# Altium PCB TEMPLATE_PCB_4L.PcbDoc
Units mm, origin at the board's own origin, x right, y up, seen from the top; angles counter-clockwise.
Board outline 50 x 50 mm, 4 copper layers (Top, GND, PWR, Bottom), stack 1.591 mm thick; 51 components, 38 nets, 188 pads, 0 vias.
Unrouted connection lines stored in the file: 119.
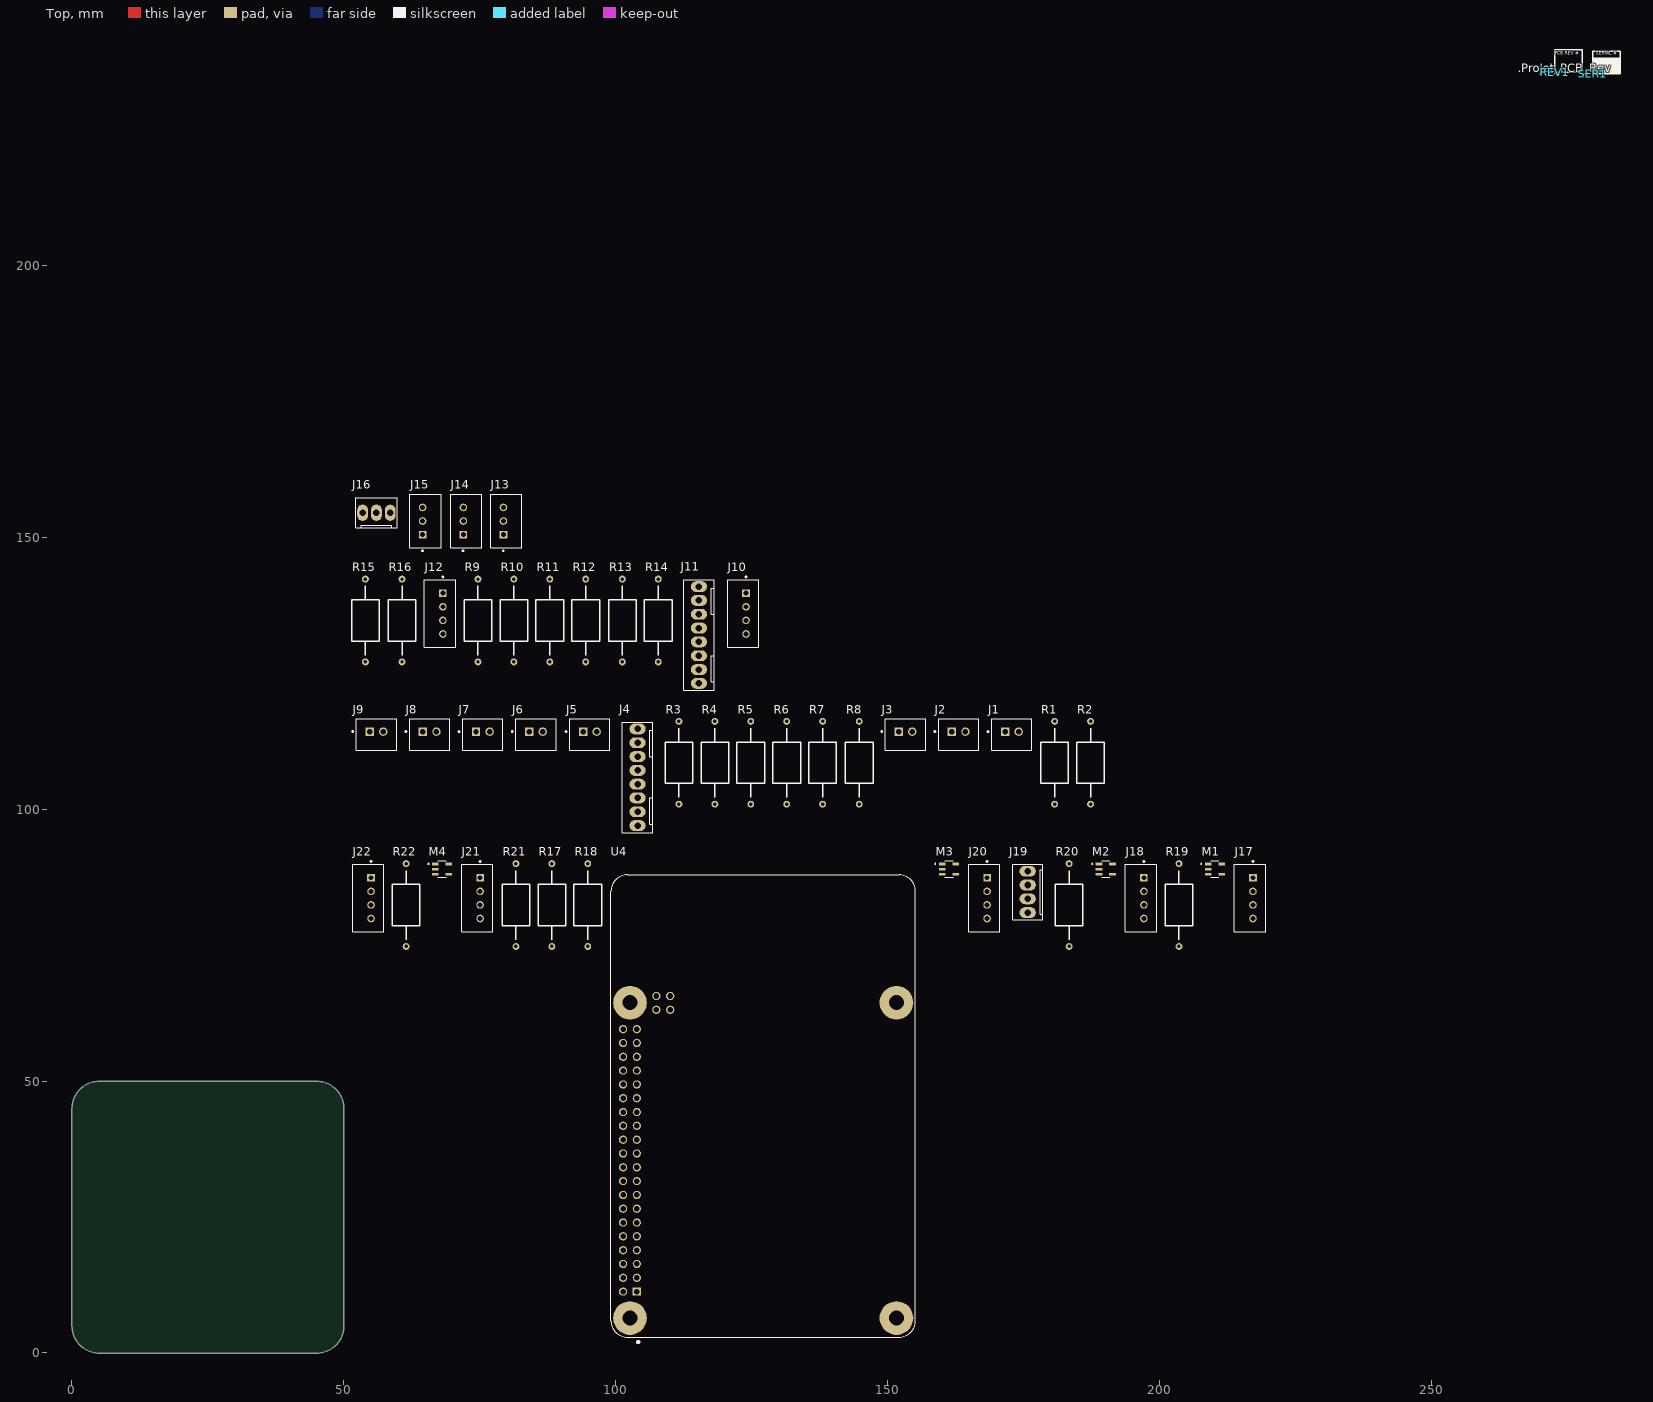
[diagram p0: Top view]
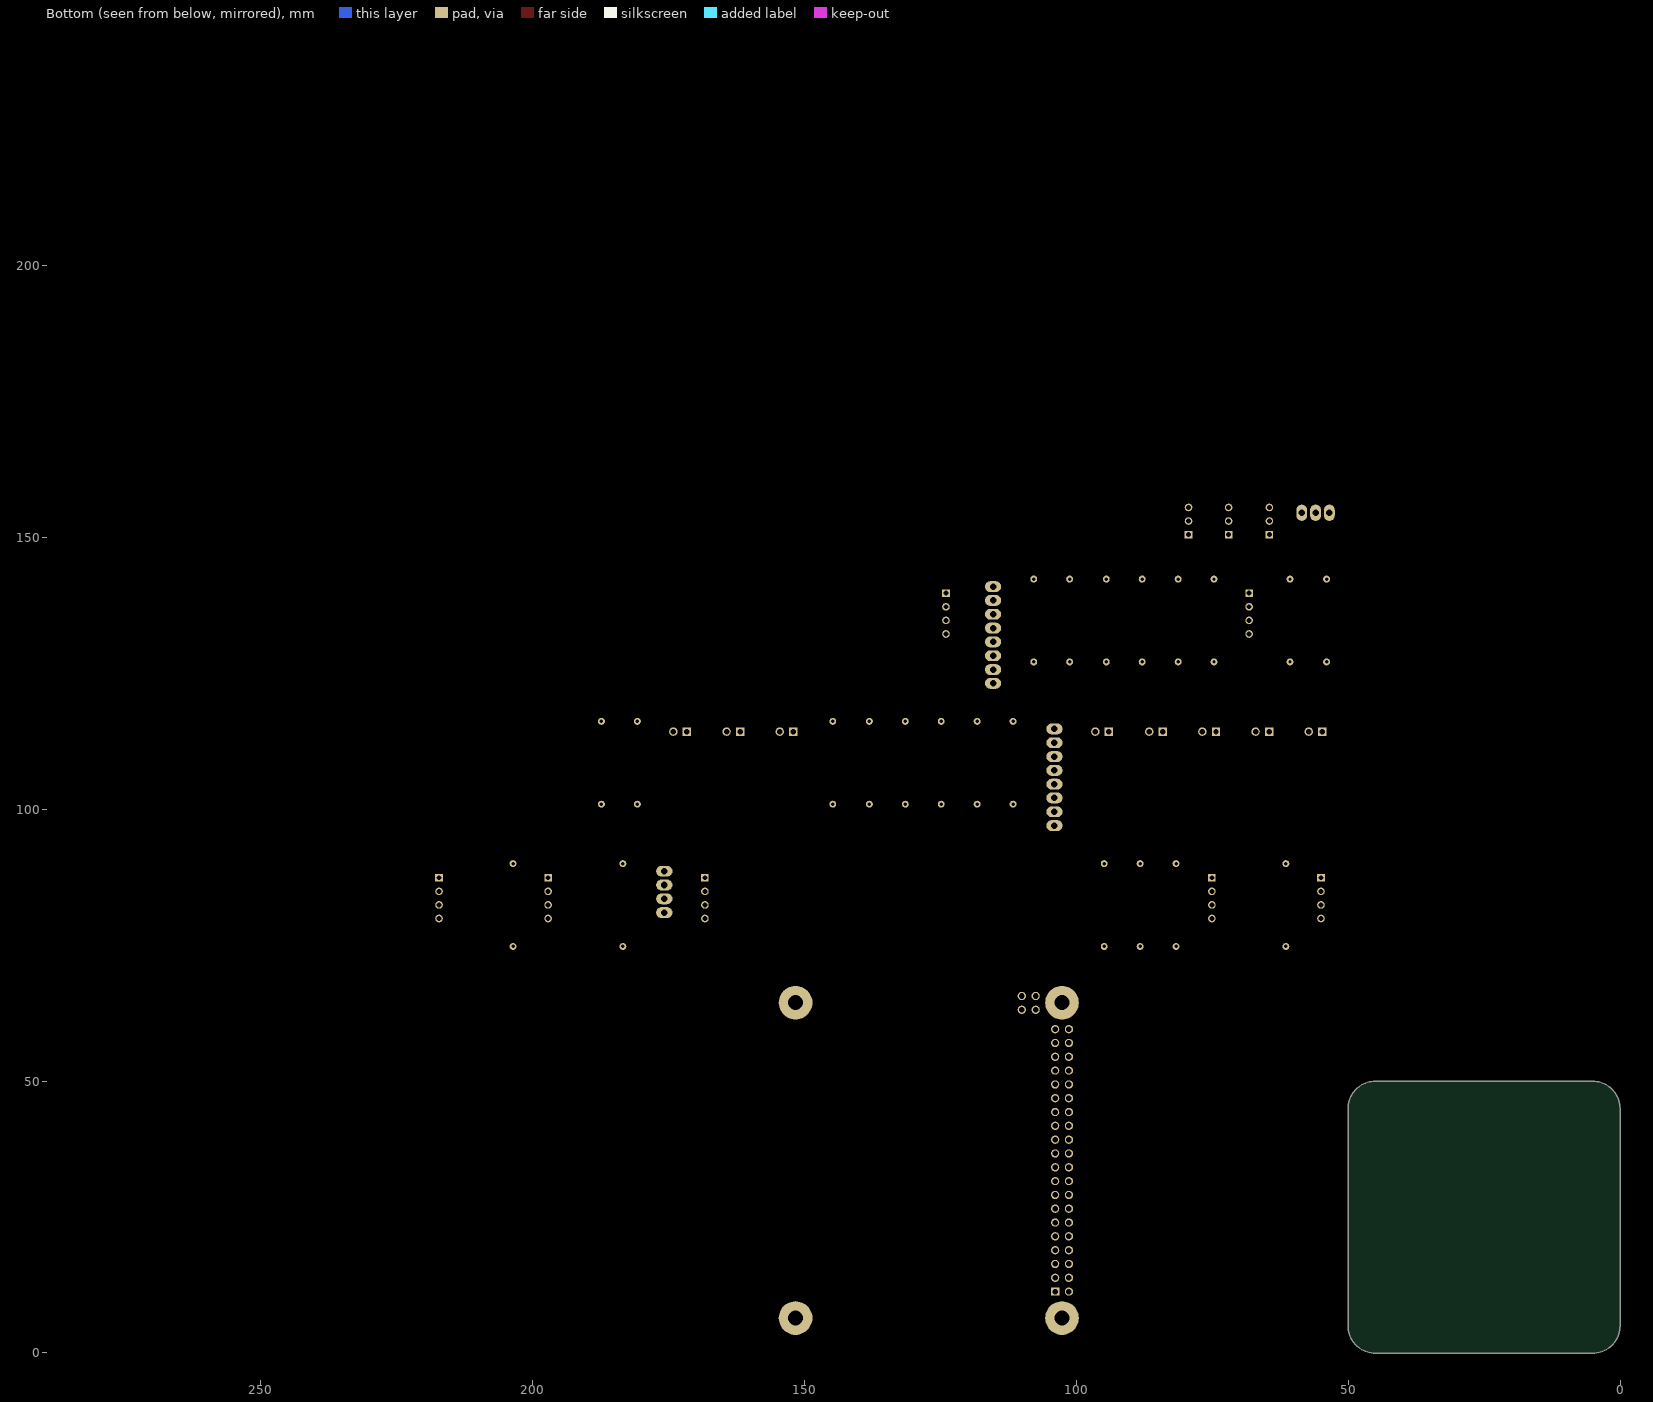
[diagram p1: Bottom view, seen from below]
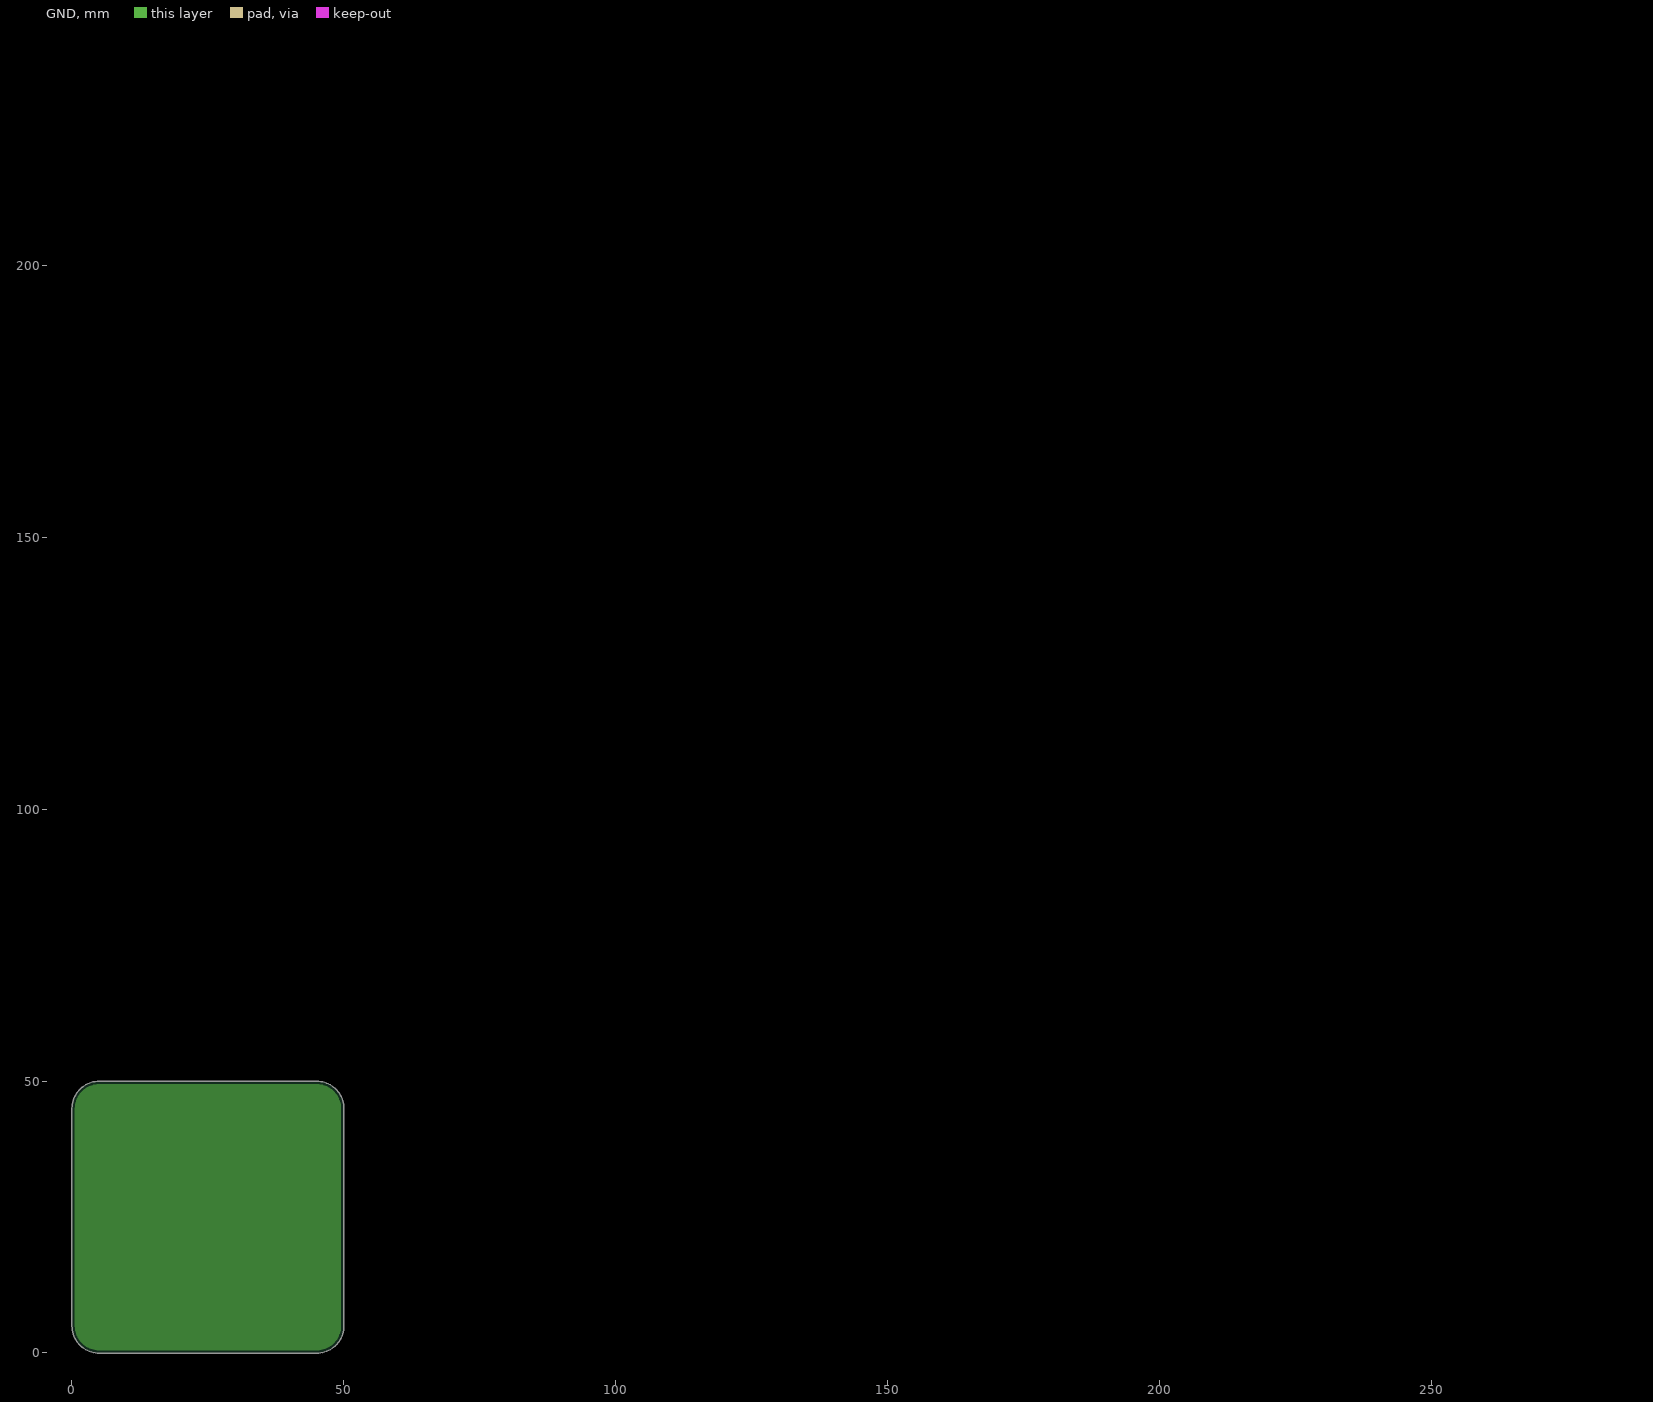
[diagram p2: GND, clearances drawn from the general rule]
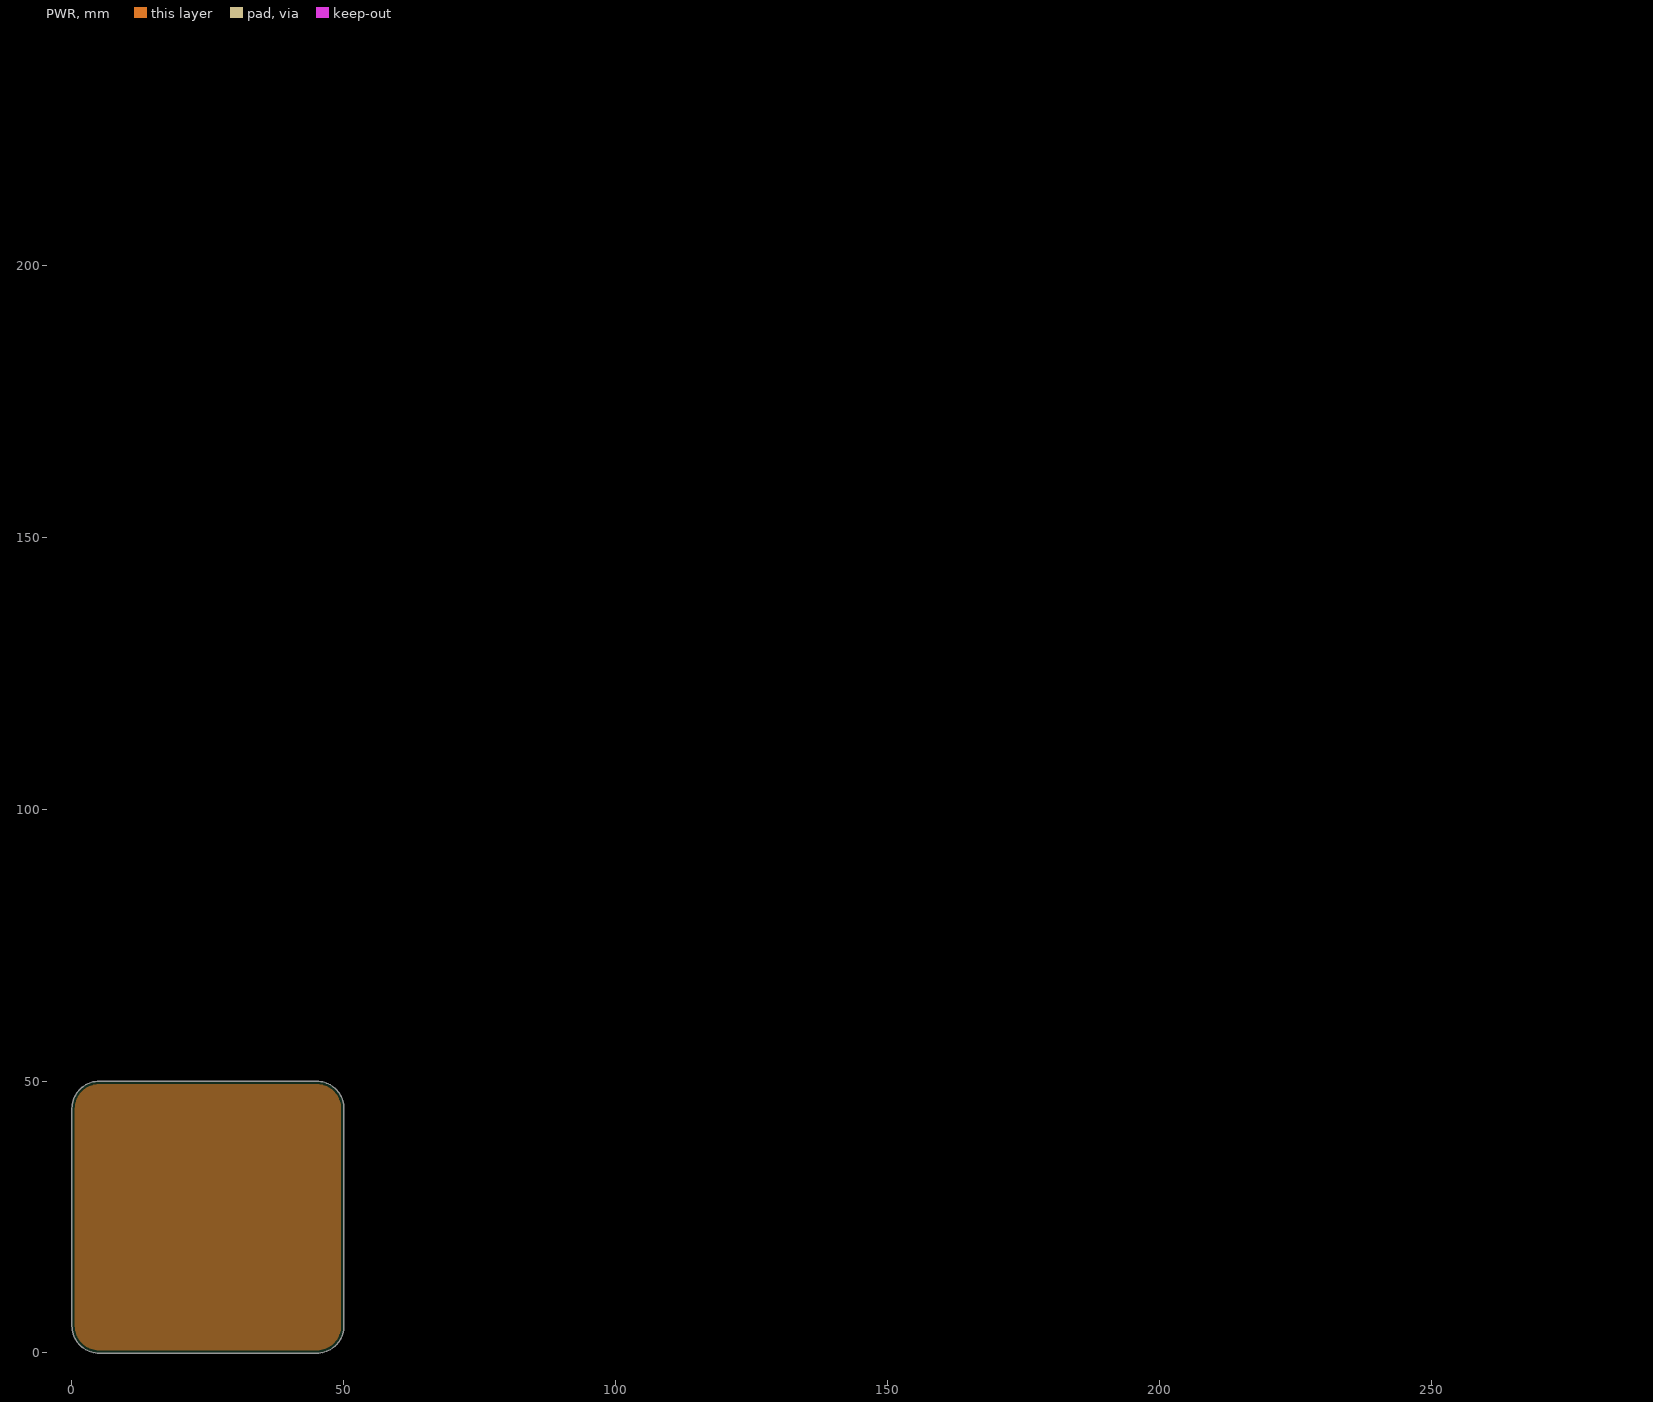
[diagram p3: PWR, clearances drawn from the general rule]

## Layer stack, top to bottom
Top Solder: solder mask 0.0102, Solder Resist, Dk 3.5
Top: signal copper 0.035
Dielectric 1: prepreg 0.2104, 7628, Dk 4.1
GND: plane copper 0.0175
Dielectric 2: core 1.065, Dk 4.6
PWR: plane copper 0.0175
Dielectric 3: prepreg 0.2104, 7628, Dk 4.6
Bottom: signal copper 0.035
Bottom Solder: solder mask 0.0102, Solder Resist, Dk 3.5

## Board outline
0,4.949 0,44.949 cw(c5,44.949) 5,49.949 45,49.949 cw(c45,44.949) 50,44.949 50,4.949 cw(c45,4.949) 45,-0.051 5,-0.051 cw(c5,4.949)

## Design rules (kind name [scope] priority, off if disabled: settings)
BoardOutlineClearance [All] p1: gap=0.2 ignorepadtopadclearanceinfootprint=FALSE except(0: Arc-SplitContinuation Track-SplitContinuation SMDPad-SplitContinuation THPad-SplitContinuation Via-SplitContinuation Fill-SplitContinuation Poly-SplitContinuation Region-SplitContinuation Text-SplitContinuation)
Clearance [All] p1: gap=0.152 ignorepadtopadclearanceinfootprint=FALSE except(0: Arc-Hole Track-Hole SMDPad-Hole THPad-Hole Via-Hole Fill-Hole Poly-Hole Region-Hole Text-Hole; 0.127: Arc-Arc Arc-Track Track-Track SMDPad-Fill SMDPad-Poly SMDPad-Region; 0.2: Arc-SMDPad Track-SMDPad; 0.254: Arc-Via Track-Via Via-Via; 0.33: Arc-THPad Track-THPad; 0.5: THPad-THPad)
ComponentClearance [All] p1: gap=0.102 collisioncheckmode=3 verticalgap=0.102 showdistances=FALSE
HoleSize [All] p1: absolutevalues=TRUE maxlimit=6.3 minlimit=0.3 maxpercent=80.000 minpercent=20.000
HoleToHoleClearance [All] p1: gap=0.5 allowstackedmicrovias=FALSE
MinimumAnnularRing [All] p1: minimumring=0.1
MinimumSolderMaskSliver [All] p1: minsoldermaskwidth=0.1
PlaneClearance [All] p1: clearance=0.152
PlaneConnect [All] p1: pad.planeconnectstyle=Relief pad.reliefexpansion=0.508 pad.reliefentries=4 pad.reliefconductorwidth=0.254 pad.reliefairgap=0.254 via.planeconnectstyle=Direct via.reliefexpansion=0.508 via.reliefentries=4 via.reliefconductorwidth=0.254 via.reliefairgap=0.254
PolygonConnect [All] p1: thpad.connectstyle=Relief thpad.reliefconductorwidth=0.254 thpad.reliefentries=4 thpad.polygonreliefangle="90 Angle" thpad.airgapwidth=0.254 smdpad.connectstyle=Relief smdpad.reliefconductorwidth=0.254 smdpad.reliefentries=4 smdpad.polygonreliefangle="90 Angle" smdpad.airgapwidth=0.254 via.connectstyle=Direct via.reliefconductorwidth=0.254 via.reliefentries=4 via.polygonreliefangle="90 Angle" via.airgapwidth=0.254
RoomDefinition Énigme2_Crocodile [InComponentClass('Énigme2_Crocodile')] p1: confinementstyle=ConfineIn formatcopy=TRUE lockcomponents=FALSE outline 51.038,120.841 126.73,120.841 126.73,145.733 51.038,145.733
RoomDefinition Énigme1_Switch [InComponentClass('Énigme1_Switch')] p2: confinementstyle=ConfineIn formatcopy=TRUE lockcomponents=FALSE outline 51.165,94.679 190.103,94.679 190.103,119.571 51.165,119.571
RoutingVias [All] p1: holewidth=0.3 width=0.5 viastyle="Through Hole" minholewidth=0.3 minwidth=0.5 maxholewidth=6.3 maxwidth=6.5
SilkToSilkClearance [All] p1: silktosilkclearance=0.102
SilkToSolderMaskClearance [IsPad] p1: minsilkscreentomaskgap=0.024 clearancetoexposedcopper=FALSE
SolderMaskExpansion SolderMaskExpansion_Via [isVia] p1: expansion=0.102 istentingtop=TRUE
SolderMaskExpansion [All] p2: expansion=0.051 istentingtop=FALSE
Width [All] p1: maxlimit=25.4 minlimit=0.127 preferedwidth=0.152 minimp=50.000000 maximp=50.000000 favimp=50.000000
22 further rules are at their usual default settings.

## Classes and differential pairs
component class Énigme3_Potentiomètres: J13 J14 J15 J16 U3
component class Énigme2_Crocodile: J10 J11 J12 R9 R10 R11 R12 R13 R14 R15 R16 U2
component class Énigme1_Switch: J1 J2 J3 J4 J5 J6 J7 J8 J9 R1 R2 R3 R4 R5 R6 R7 R8 U1
component class Raspberry_Pi_4_ModelB: J17 J18 J19 J20 J21 J22 M1 M2 M3 M4 R17 R18 R19 R20 R21 R22 U4
component class TEMPLATE_Title: REV1 SER1

## Components (designator, comment, footprint, x,y, rotation, side; value= is the part's Value field where it differs from the comment)
J1 "B2B-XH-A(LF)(SN)" FP-B2B-XH-A_LF_SN-MFG 172.831,113.729 r0 top
J2 "B2B-XH-A(LF)(SN)" FP-B2B-XH-A_LF_SN-MFG 163.052,113.729 r0 top
J3 "B2B-XH-A(LF)(SN)" FP-B2B-XH-A_LF_SN-MFG 153.273,113.729 r0 top
J4 "0022272081" "MOLEX KK 0022272081" 103.997,105.855 r90 top
J5 "B2B-XH-A(LF)(SN)" FP-B2B-XH-A_LF_SN-MFG 95.234,113.729 r0 top
J6 "B2B-XH-A(LF)(SN)" FP-B2B-XH-A_LF_SN-MFG 85.328,113.729 r0 top
J7 "B2B-XH-A(LF)(SN)" FP-B2B-XH-A_LF_SN-MFG 75.549,113.729 r0 top
J8 "B2B-XH-A(LF)(SN)" FP-B2B-XH-A_LF_SN-MFG 65.77,113.729 r0 top
J9 "B2B-XH-A(LF)(SN)" FP-B2B-XH-A_LF_SN-MFG 55.991,113.729 r0 top
J10 "B4B-XH-A(LF)(SN)" FP-B4B-XH-A_LF_SN-MFG 123.428,135.954 r90 top
J11 "0022272081" "MOLEX KK 0022272081" 115.3,132.017 r90 top
J12 "B4B-XH-A(LF)(SN)" FP-B4B-XH-A_LF_SN-MFG 67.675,135.954 r90 top
J13 "B3B-XH-A(LF)(SN)" FP-B3B-XH-A_LF_SN-MFG 79.867,152.972 r90 top
J14 "B3B-XH-A(LF)(SN)" FP-B3B-XH-A_LF_SN-MFG 72.501,152.972 r90 top
J15 "B3B-XH-A(LF)(SN)" FP-B3B-XH-A_LF_SN-MFG 65.008,152.972 r90 top
J16 "0022272031" "MOLEX KK 0022272031" 55.991,154.496 r0 top
J17 "B4B-XH-A(LF)(SN)" FP-B4B-XH-A_LF_SN-MFG 216.646,83.63 r90 top
J18 "B4B-XH-A(LF)(SN)" FP-B4B-XH-A_LF_SN-MFG 196.58,83.63 r90 top
J19 "0022272041" "MOLEX KK 0022272041" 175.752,84.773 r90 top
J20 "B4B-XH-A(LF)(SN)" FP-B4B-XH-A_LF_SN-MFG 167.751,83.63 r90 top
J21 "B4B-XH-A(LF)(SN)" FP-B4B-XH-A_LF_SN-MFG 74.533,83.63 r90 top
J22 "B4B-XH-A(LF)(SN)" FP-B4B-XH-A_LF_SN-MFG 54.467,83.63 r90 top
M1 "74HC1G125GV-Q100H" SOT95P275X110-5N 210.169,88.964 r0 top
M2 "74HC1G125GV-Q100H" SOT95P275X110-5N 190.103,88.964 r0 top
M3 "74HC1G125GV-Q100H" SOT95P275X110-5N 161.274,88.964 r0 top
M4 "74HC1G125GV-Q100H" SOT95P275X110-5N 68.056,88.964 r0 top
R1 "10 Kohm" Res_Template 180.705,100.902 r90 top
R2 "10 Kohm" Res_Template 187.309,100.902 r90 top
R3 "10 Kohm" Res_Template 111.617,100.902 r90 top
R4 "10 Kohm" Res_Template 118.221,100.902 r90 top
R5 "10 Kohm" Res_Template 124.825,100.902 r90 top
R6 "10 Kohm" Res_Template 131.429,100.902 r90 top
R7 "10 Kohm" Res_Template 138.033,100.902 r90 top
R8 "10 Kohm" Res_Template 144.764,100.902 r90 top
R9 "10 Kohm" Res_Template 74.66,127.064 r90 top
R10 "10 Kohm" Res_Template 81.264,127.064 r90 top
R11 "10 Kohm" Res_Template 87.868,127.064 r90 top
R12 "10 Kohm" Res_Template 94.472,127.064 r90 top
R13 "10 Kohm" Res_Template 101.203,127.064 r90 top
R14 "10 Kohm" Res_Template 107.807,127.064 r90 top
R15 "10 Kohm" Res_Template 53.959,127.064 r90 top
R16 "10 Kohm" Res_Template 60.69,127.064 r90 top
R17 "470 ohm" Res_Template 88.249,74.74 r90 top
R18 "470 ohm" Res_Template 94.853,74.74 r90 top
R19 "10 Kohm" Res_Template 203.565,74.74 r90 top
R20 "10 Kohm" Res_Template 183.372,74.74 r90 top
R21 "10 Kohm" Res_Template 81.645,74.74 r90 top
R22 "10 Kohm" Res_Template 61.452,74.74 r90 top
REV1 "Revision Cartridge Mini" REV_REVISION_CARTRIDGE_MINI 272.685,235.521 r0 top
SER1 "Serial Cartridge MICRO" SER_SERIAL_CARTRIDGE_MICRO 279.67,235.267 r0 top
U4 "RASPBERRY_PI_4B_4GB" MODULE_RASPBERRY_PI_4B_4GB 127.111,45.403 r90 top

## Footprints (in the part's own frame and the unit in brackets; to place one, negate y for a bottom-side part, rotate by r counter-clockwise, add the part's x,y. Pads: shape width x height; smd on the part's side, far side on the other; paste and mask are expansions set on the pad)
FP-B2B-XH-A_LF_SN-MFG [mm]
  rect 1.55x1.55 hole 1 paste-2539.97 mask+0: 1(-1.25,0.525)
  round 1.55 hole 1 paste-2539.97 mask+0: 2(1.25,0.525)
  silkscreen extent -4.5,-2.88 3.7,2.88, body extent -3.8,-2.98 3.8,2.98, height 0.25
FP-B3B-XH-A_LF_SN-MFG [mm]
  rect 1.4x1.4 hole 0.9 paste-2539.97 mask+0: 1(-2.5,0.525)
  round 1.4 hole 0.9 paste-2539.97 mask+0: 2(0,0.525) 3(2.5,0.525)
  silkscreen extent -5.6,-2.88 4.95,2.88, body extent -5.05,-2.98 5.05,2.98, height 0.25
FP-B4B-XH-A_LF_SN-MFG [mm]
  rect 1.4x1.4 hole 0.9 paste-2539.97 mask+0: 1(3.75,-0.525)
  round 1.4 hole 0.9 paste-2539.97 mask+0: 2(1.25,-0.525) 3(-1.25,-0.525) 4(-3.75,-0.525)
  silkscreen extent -6.2,-2.88 6.87,2.88, body extent -6.3,-2.98 6.3,2.98, height 0.25
MODULE_RASPBERRY_PI_4B_4GB [mil]
  rect 60x60 / inner round 60 / far side rect 60x60 hole 40: 1(-1343.7,914.57)
  round 60 hole 40: 2(-1343.7,1014.57) 3(-1243.7,914.57) 4(-1243.7,1014.57) 5(-1143.7,914.57) 6(-1143.7,1014.57) 7(-1043.7,914.57) 8(-1043.7,1014.57) 9(-943.7,914.57) 10(-943.7,1014.57) 11(-843.7,914.57) 12(-843.7,1014.57) 13(-743.7,914.57) 14(-743.7,1014.57) 15(-643.7,914.57) 16(-643.7,1014.57) 17(-543.7,914.57) 18(-543.7,1014.57) 19(-443.7,914.57) 20(-443.7,1014.57) 21(-343.7,914.57) 22(-343.7,1014.57) 23(-243.7,914.57) 24(-243.7,1014.57) 25(-143.7,914.57) 26(-143.7,1014.57) 27(-43.7,914.57) 28(-43.7,1014.57) 29(56.3,914.57) 30(56.3,1014.57) 31(156.3,914.57) 32(156.3,1014.57) 33(256.3,914.57) 34(256.3,1014.57) 35(356.3,914.57) 36(356.3,1014.57) 37(456.3,914.57) 38(456.3,1014.57) 39(556.3,914.57) 40(556.3,1014.57) 41(796.46,673.5) 42(796.46,773.5) 43(696.46,673.5) 44(696.46,773.5)
  round 244.09 hole 108.27: S1(-1535.43,964.57) S2(748.03,964.57) S3(748.03,-964.57) S4(-1535.43,-964.57)
  silkscreen extent -1717,-1102 1673,1102
"MOLEX KK 0022272031" [mm]
  oval 2x3 hole 1.2: 1(-2.54,0) 2(0,0) 3(2.54,0)
  silkscreen extent -3.81,-2.79 3.81,2.79, body extent -3.81,-2.9 3.81,2.9, height 11.7
"MOLEX KK 0022272041" [mm]
  oval 2x3 hole 1.2: 1(-3.81,0) 2(-1.27,0) 3(1.27,0) 4(3.81,0)
  silkscreen extent -5.08,-2.79 5.08,2.79, body extent -5.08,-2.9 5.08,2.9, height 11.7
"MOLEX KK 0022272081" [mm]
  oval 2x3 hole 1.2: 1(-8.89,0) 2(-6.35,0) 3(-3.81,0) 4(-1.27,0) 5(1.27,0) 6(3.81,0) 7(6.35,0) 8(8.89,0)
  silkscreen extent -10.16,-2.79 10.16,2.79, body extent -10.16,-2.9 10.16,2.9, height 11.7
Res_Template [mm]
  round 1.27 hole 0.635: 1(0,0) 2(15.24,0)
  silkscreen extent 1.27,-2.54 13.97,2.54
REV_REVISION_CARTRIDGE_MINI [mm]
  silkscreen extent 0,0 5,4.08
SER_SERIAL_CARTRIDGE_MICRO [mm]
  silkscreen extent 0,0 5.02,4.08
SOT95P275X110-5N [mm]
  rrect25% 1.22x0.5 smd: 1(-1.245,0.95) 2(-1.245,0) 3(-1.245,-0.95) 4(1.245,-0.95) 5(1.245,0.95)
  silkscreen extent -2.6,-1.52 0.75,1.52, body extent -1.38,-1.45 1.38,1.45, height 1.1

## Part data
J1 J2 J3 J5 J6 J7 J8 J9: library part CMP-2000-05888-3, "CONN HEADER VERT 2POS 2.5MM", Color=Natural, Contact Resistance=20mR, Current Rating=3A, Housing Color=White, Insulation Resistance=1GR, Max Operating Temperature=85°C, Max Voltage Rating (AC)=250V, Min Operating Temperature=-25°C, Connector Type="Male Pin", Contact Material=Brass, Contact Plating=Tin, Contact Type="Male Pin", Depth=5.75mm, Fastening Type=Detent, Housing Material=Polyamide, Lead Free="Lead Free", Lead Pitch=2.5mm, Length=7.4mm, Max Current Rating=3A, Max Voltage Rating (DC)=250V, Mount="Through Hole", Number of Contacts=2, Number of Positions=2, Number of Rows=1, Orientation=Straight, Packaging=Bulk, Pitch=2.5mm, REACH SVHC="No SVHC", Series=XH, Termination=Solder, Voltage Rating=250V, Voltage Rating (AC)=250V, Wire/Cable Gauge=22AWG
J4 J11: "CONN HEADER VERT 8POS 2.54MM", Part Number=0022272081
J10 J12 J17 J18 J20 J21 J22: library part CMP-17439-000250-1, "CONN HEADER VERT 4POS 2.5MM", Color=Natural, Contact Resistance=20mR, Current Rating=3A, Flammability Rating="UL94 V-0", Housing Color=White, Insulation Resistance=1GR, Max Operating Temperature=85°C, Max Voltage Rating (AC)=250V, Min Operating Temperature=-25°C, Package Quantity=500, Connector Type=Header, Contact Finish - Mating=TIN, Contact Material=Brass, Contact Plating=Tin, Contact Shape=Square, Contact Type="Male Pin", Depth=5.75mm, Fastening Type=Detent, Gender=Male, Housing Material=Polyamide, Insulation Color=Natural, Insulation Material=Nylon, Lead Free="Lead Free", Lead Pitch=2.5mm, Length=12.4mm, Mated Stacking Heights=9.8mm, Material=Polyamide, Max Current Rating=3A, Max Voltage Rating (DC)=250V, Mount="Through Hole", Number of Contacts=4, Number of Positions=4, Number of Rows=1, Orientation=Straight, Packaging=Bulk, Pitch=2.5mm, REACH SVHC="No SVHC", Series=XH, Termination=Solder, Voltage Rating=250V, Voltage Rating (AC)=250V, Wire/Cable Gauge=22AWG
J13 J14 J15: library part CMP-17439-000014-3, "CONN HEADER VERT 3POS 2.5MM", Color=Natural, Contact Resistance=20mR, Current Rating=3A, Flammability Rating="UL94 V-0", Housing Color=White, Insulation Resistance=1GR, Max Operating Temperature=85°C, Max Voltage Rating (AC)=250V, Min Operating Temperature=-25°C, Connector Type=Header, Contact Finish - Mating=TIN, Contact Material=Brass, Contact Plating=Tin, Contact Shape=Square, Contact Type="Male Pin", Depth=5.75mm, Fastening Type=Detent, Gender=Male, Housing Material=Polyamide, Insulation Color=Natural, Insulation Material=Nylon, Lead Free="Lead Free", Lead Pitch=2.5mm, Length=9.9mm, Max Current Rating=3A, Max Voltage Rating (DC)=250V, Mount="Through Hole", Number of Contacts=3, Number of Positions=3, Number of Rows=1, Orientation=Straight, Packaging=Bulk, Pitch=2.5mm, REACH SVHC="No SVHC", Series=XH, Termination=Solder, Voltage Rating=250V, Voltage Rating (AC)=250V, Wire/Cable Gauge=22AWG
J16: "CONN HEADER VERT 3POS 2.54MM", Part Number=0022272031
J19: "CONN HEADER VERT 4POS 2.54MM", Part Number=0022272041
M1 M2 M3 M4: library part "74HC1G125GV-Q100H NXP Semiconductors", "Bus Driver, HC/UH Series, 1-Func, 1-Bit, True Output, CMOS, PDSO5", Supply Voltage-Max=6V, Supply Voltage-Min=2V, Supply Voltage-Nominal=5V, ComponentLink1Description="New link", ComponentLink1URL=https://www.snapeda.com/parts/74HC1G125GV-Q100H/Nexperia/view-part/?welcome=home&ref=octopart, Surface Mount=Yes
R1 R2 R3 R4 R5 R6 R7 R8 R9 R10 R11 R12 R13 R14 R15 R16 R19 R20 R21 R22: library part "470 ohm", "Custom Semiconductor Resistor"
R17 R18: "Custom Semiconductor Resistor"
REV1: library part REV_REVISION_CARTRIDGE_MINI, "REV - REVISION CARTRIDGE MINI", Assembly Type=NONE, Rule="Component Clearance Constraint [Horizontal Clearance = 0mil    Vertical Clearance = 0mil]"
SER1: library part SER_SERIAL_CARTRIDGE_MICRO, "SER - SERIAL CARTRIDGE MICRO", Assembly Type=NONE, Rule="Component Clearance Constraint [Horizontal Clearance = 0mil    Vertical Clearance = 0mil]"
U4: "BCM2711 Raspberry Pi 4 Model B 4GB - ARMÂ® CortexÂ®-A72 MPU Embedded Evaluation Board", Package=None, Availability="In Stock", Check_prices=https://www.snapeda.com/parts/RASPBERRY%20PI%204B/4GB/Raspberry+Pi/view-part/?ref=eda, MF="Raspberry Pi", MP="RASPBERRY PI 4B/4GB", Price=None, Purchase-URL="https://pricing.snapeda.com/search/part/RASPBERRY PI 4B/4GB/?ref=eda", SnapEDA_Link=https://www.snapeda.com/parts/RASPBERRY%20PI%204B/4GB/Raspberry+Pi/view-part/?ref=snap

## Nets (pads, with @x,y where several pads share a name; then routed paths per layer and width w, separated by ;. In a path a pad name is that pad's centre, name@x,y a point inside that pad or via, vN(x,y) a via of type N, cw(c..) or ccw(c..) an arc to the next point about the centre after c; other vN are vias at no path point)
3V3: J13.1 J14.1 J15.1 R1.2 R2.2 R3.2 R4.2 R5.2 R6.2 R7.2 R8.2
5V: J17.1 J18.1 J20.1 J21.1 J22.1 M1.5 M2.5 M3.5 M4.5 U4.2
GND: J1.2 J2.2 J3.2 J5.2 J6.2 J7.2 J8.2 J9.2 J13.3 J14.3 J15.3 J17.4 J18.4 J19.2 J20.4 J21.4 J22.4 M1.1 M1.3 M2.1 M2.3 M3.1 M3.3 M4.1 M4.3 R9.1 R10.1 R11.1 R12.1 R13.1 R14.1 R15.1 R16.1 R19.1 R20.1 R21.1 R22.1 U4.6 U4.9 U4.14 U4.20 U4.25 U4.30 U4.34 U4.39
NetJ1_1: J1.1 J4.1 R2.1
NetJ2_1: J2.1 J4.2 R1.1
NetJ3_1: J3.1 J4.3 R3.1
NetJ4_4: J4.4 J5.1 R4.1
NetJ4_5: J4.5 J6.1 R5.1
NetJ4_6: J4.6 J7.1 R6.1
NetJ4_7: J4.7 J8.1 R7.1
NetJ4_8: J4.8 J9.1 R8.1
NetJ10_1: J10.1 J11.1 R9.2
NetJ10_2: J10.2 J11.2 R10.2
NetJ10_3: J10.3 J11.3 R11.2
NetJ10_4: J10.4 J11.4 R12.2
NetJ11_5: J11.5 J12.1 R13.2
NetJ11_6: J11.6 J12.2 R14.2
NetJ11_7: J11.7 J12.3 R15.2
NetJ11_8: J11.8 J12.4 R16.2
NetJ13_2: J13.2 J16.1
NetJ14_2: J14.2 J16.2
NetJ15_2: J15.2 J16.3
NetJ17_3: J17.3 M1.4
NetJ18_3: J18.3 M2.4
NetJ19_1: J19.1 R17.2 R18.1 U4.1
NetJ20_3: J20.3 M3.4
NetJ21_3: J21.3 M4.4
NetJ22_2: J22.2 U4.33
NetJ22_3: J22.3 U4.37
NetM1_2: M1.2 R19.2 U4.12
NetM2_2: M2.2 R20.2 U4.32
NetM3_2: M3.2 R21.2 U4.40
NetM4_2: M4.2 R22.2 U4.19
Reset_Croco: U4.38
Reset_Pot: U4.35
Reset_Switch: U4.36
SCL: J19.3 R18.2 U4.5
SDA: J19.4 R17.1 U4.3
pads on no net: J17.2 J18.2 J20.2 J21.2 U4.4 U4.7 U4.8 U4.10 U4.11 U4.13 U4.15 U4.16 U4.17 U4.18 U4.21 U4.22 U4.23 U4.24 U4.26 U4.27 U4.28 U4.29 U4.31 U4.41 U4.42 U4.43 U4.44 U4.S1 U4.S2 U4.S3 U4.S4

## Polygon pours and split planes (outlines as drawn)
no net on GND (split plane): 45.294,49.431 45.586,49.402 45.876,49.355 46.163,49.288 46.444,49.202 46.719,49.099 46.987,48.978 47.246,48.839 47.496,48.684 47.734,48.513 47.962,48.326 48.176,48.125 48.377,47.911 48.564,47.683 48.735,47.445 48.89,47.195 49.029,46.936 49.15,46.668 49.253,46.393 49.339,46.112 49.406,45.825 49.453,45.535 49.482,45.243 49.491,44.967 49.49,44.949 49.49,4.949 49.491,4.931 49.482,4.655 49.453,4.363 49.406,4.073 49.339,3.786 49.253,3.505 49.15,3.23 49.029,2.962 48.89,2.703 48.735,2.453 48.564,2.215 48.377,1.987 48.176,1.773 47.962,1.572 47.734,1.385 47.496,1.214 47.246,1.059 46.987,0.92 46.719,0.799 46.444,0.696 46.163,0.61 45.876,0.543 45.586,0.496 45.294,0.467 45.018,0.458 45,0.459 5,0.459 4.982,0.458 4.706,0.467 4.414,0.496 4.124,0.543 3.837,0.61 3.556,0.696 3.281,0.799 3.013,0.92 2.754,1.059 2.504,1.214 2.266,1.385 2.038,1.572 1.824,1.773 1.623,1.987 1.436,2.215 1.265,2.453 1.11,2.703 0.971,2.962 0.85,3.23 0.747,3.505 0.661,3.786 0.594,4.073 0.547,4.363 0.518,4.655 0.509,4.931 0.51,4.949 0.51,44.949 0.509,44.967 0.518,45.243 0.547,45.535 0.594,45.825 0.661,46.112 0.747,46.393 0.85,46.668 0.971,46.936 1.11,47.195 1.265,47.445 1.436,47.683 1.623,47.911 1.824,48.125 2.038,48.326 2.266,48.513 2.504,48.684 2.754,48.839 3.013,48.978 3.281,49.099 3.556,49.202 3.837,49.288 4.124,49.355 4.414,49.402 4.706,49.431 4.982,49.44 5,49.439 45,49.439 45.018,49.44
no net on PWR (split plane): 45.294,49.431 45.586,49.402 45.876,49.355 46.163,49.288 46.444,49.202 46.719,49.099 46.987,48.978 47.246,48.839 47.496,48.684 47.734,48.513 47.962,48.326 48.176,48.125 48.377,47.911 48.564,47.683 48.735,47.445 48.89,47.195 49.029,46.936 49.15,46.668 49.253,46.393 49.339,46.112 49.406,45.825 49.453,45.535 49.482,45.243 49.491,44.967 49.49,44.949 49.49,4.949 49.491,4.931 49.482,4.655 49.453,4.363 49.406,4.073 49.339,3.786 49.253,3.505 49.15,3.23 49.029,2.962 48.89,2.703 48.735,2.453 48.564,2.215 48.377,1.987 48.176,1.773 47.962,1.572 47.734,1.385 47.496,1.214 47.246,1.059 46.987,0.92 46.719,0.799 46.444,0.696 46.163,0.61 45.876,0.543 45.586,0.496 45.294,0.467 45.018,0.458 45,0.459 5,0.459 4.982,0.458 4.706,0.467 4.414,0.496 4.124,0.543 3.837,0.61 3.556,0.696 3.281,0.799 3.013,0.92 2.754,1.059 2.504,1.214 2.266,1.385 2.038,1.572 1.824,1.773 1.623,1.987 1.436,2.215 1.265,2.453 1.11,2.703 0.971,2.962 0.85,3.23 0.747,3.505 0.661,3.786 0.594,4.073 0.547,4.363 0.518,4.655 0.509,4.931 0.51,4.949 0.51,44.949 0.509,44.967 0.518,45.243 0.547,45.535 0.594,45.825 0.661,46.112 0.747,46.393 0.85,46.668 0.971,46.936 1.11,47.195 1.265,47.445 1.436,47.683 1.623,47.911 1.824,48.125 2.038,48.326 2.266,48.513 2.504,48.684 2.754,48.839 3.013,48.978 3.281,49.099 3.556,49.202 3.837,49.288 4.124,49.355 4.414,49.402 4.706,49.431 4.982,49.44 5,49.439 45,49.439 45.018,49.44

## Silkscreen, mask and mechanical layers (free items; w line width, h text height)
Top Overlay:
  text "0" at -39.82,38.103 h3.5
  text ".Projet_Titre" at -36.651,32.637 h3.5
  text ".Projet_nom_du_cours" at -37.973,25.654 h2
  text ".Projet_Date" at -32.893,23.622 h0.91
  text "Conçu par :" at -34.163,13.97 h2
  text ".Projet_Concepteur1" at -23.241,13.97 h2
  text ".Projet_Concepteur2" at -23.241,11.684 h2
  text ".Projet_Concepteur3" at -23.241,9.398 h2
  text ".Projet_Concepteur4" at -23.241,7.112 h2
  text "JLCJLCJLCJLC" at -32.108,4.595 h0.8
Board Outline:
  lines w0.254: 0,5 ccw(c5,5) 5,0 45,0 ccw(c45,5) 50,5 50,45 ccw(c45,45) 45,50 5,50 ccw(c5,45) 0,45 0,5

## Text inside footprints (layer, text, board x,y; h text height)
REV1: Top Overlay "PCB REV #" at 272.685,238.471 h1
SER1: Top Overlay "SERIAL #" at 280.233,238.459 h1